# Altium PCB STM32F407.PcbDoc
Units mil, origin at the board's own origin, x right, y up, seen from the top; angles counter-clockwise.
Board outline 2700.03 x 3947.04 mil, 2 copper layers (Top Layer, Bottom Layer); 4 components, 0 nets, 134 pads, 0 vias.
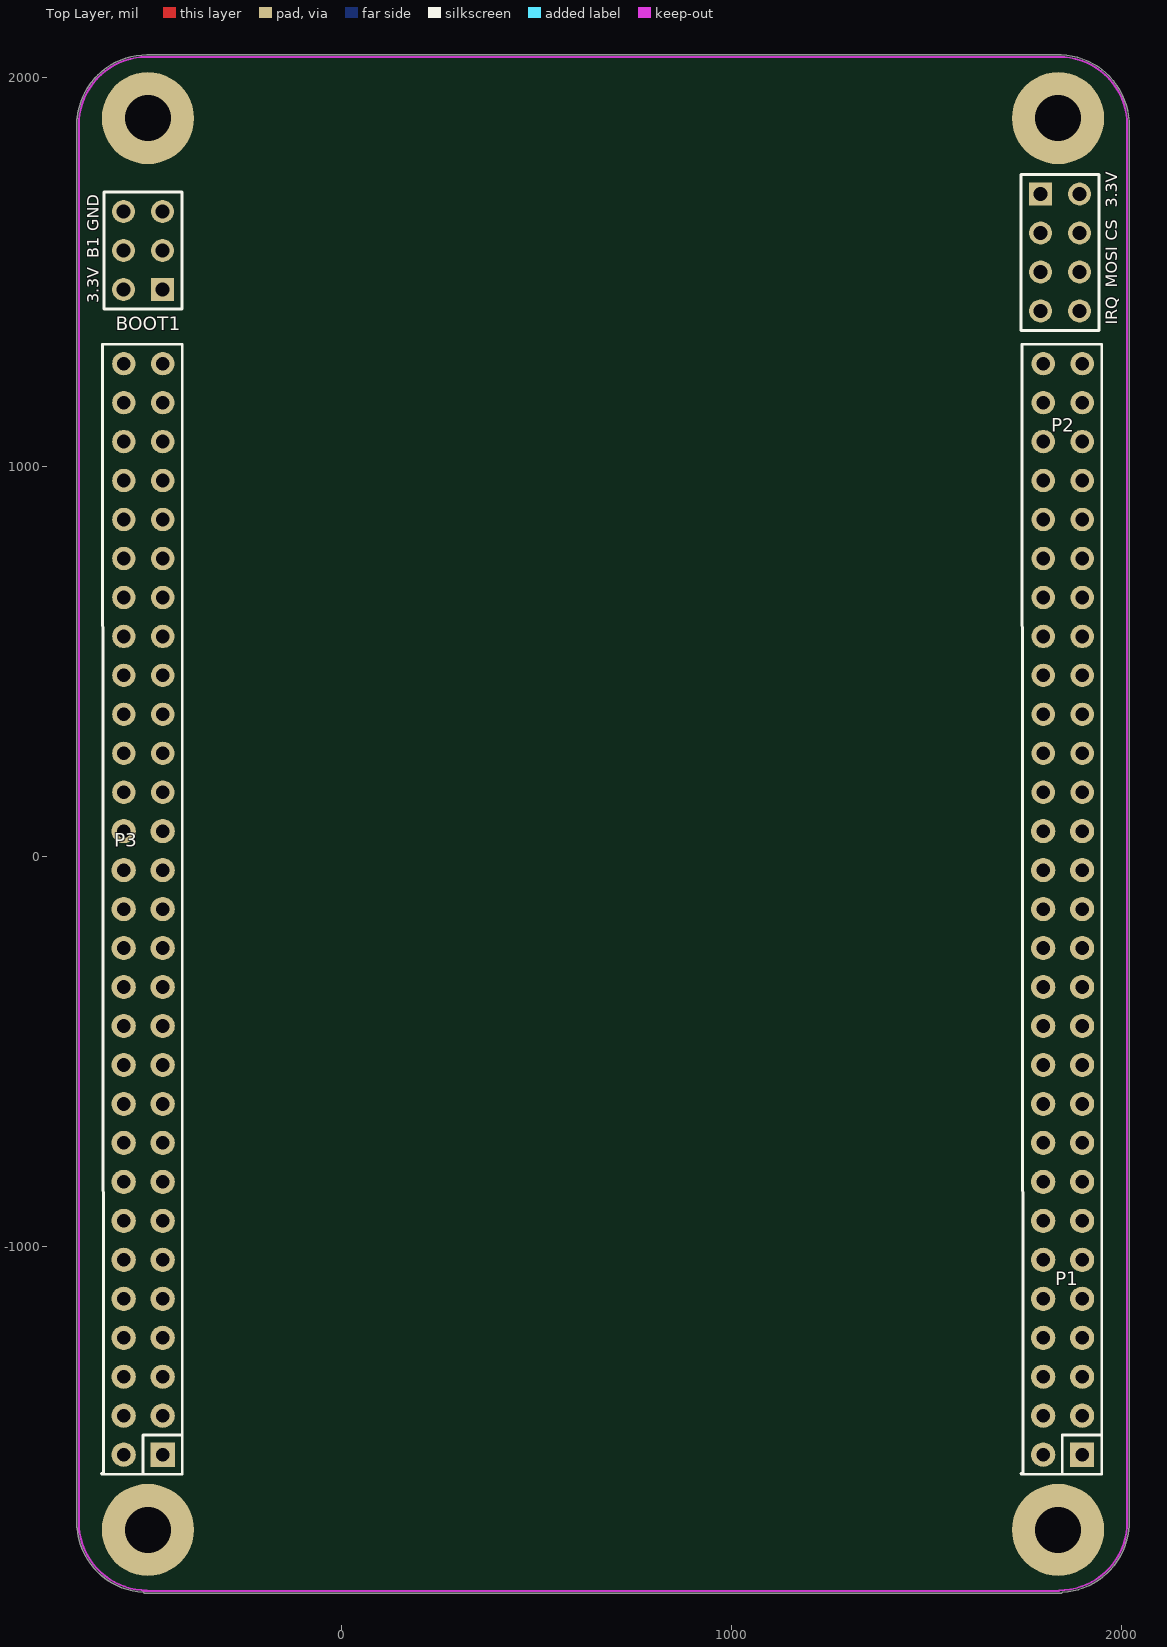
[diagram p0: Top Layer view]
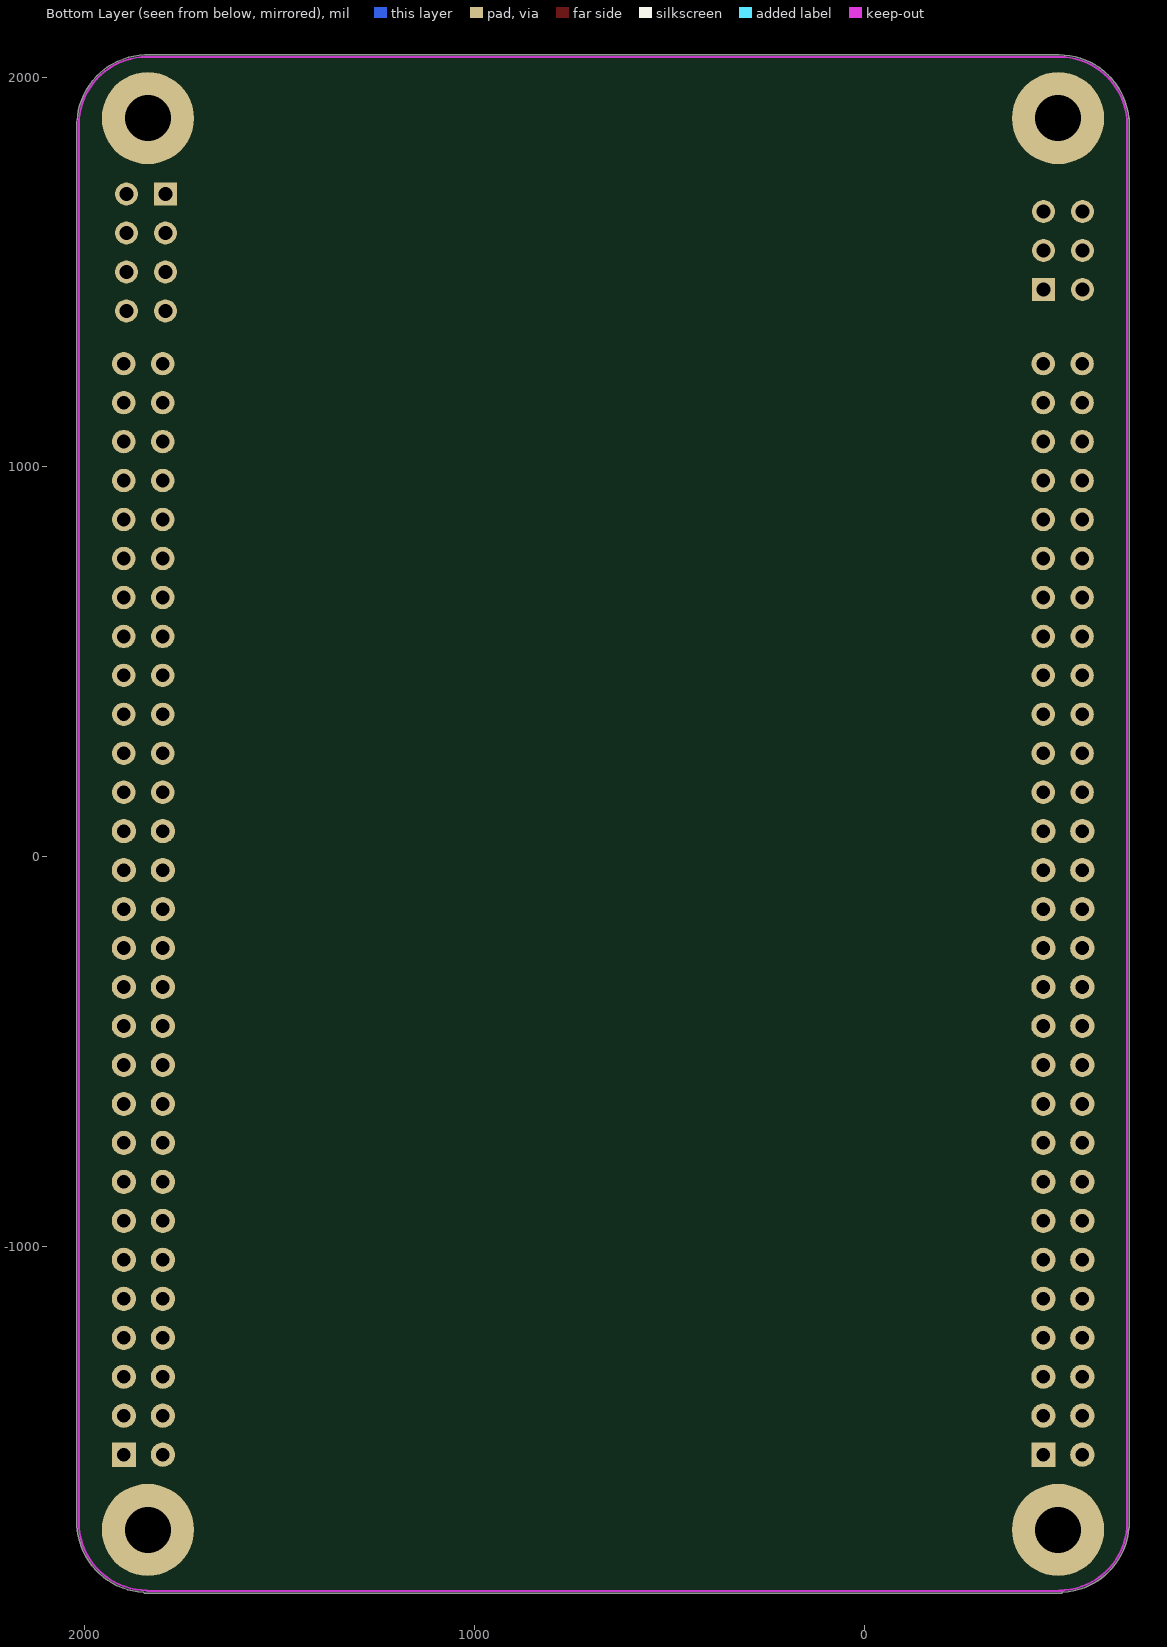
[diagram p1: Bottom Layer view, seen from below]

## Layer stack, top to bottom
Top Layer: signal copper 1.4
Dielectric: dielectric 12.6, FR-4, Dk 4.8
Bottom Layer: signal copper 1.4

## Board outline
-509.18,-1887.78 cw(c-500.07,-1708.06) -679.45,-1722.31 cw(c-675,-1720) -680.02,-1720 -680.02,1892.01 cw(c-675,1892.01) -679.14,1894.84 cw(c-500.07,1877.08) -500.01,2057.02 cw(c-500,2052.01) -500,2057.02 1845,2057.02 cw(c1845,2052.01) 1846,2056.92 cw(c1840,1877.08) 2019.68,1886.8 cw(c2015,1885) 2020.01,1885 2020.01,-1715 cw(c2015,-1715) 2019.82,-1716.39 cw(c1840.07,-1707.99) 1849.22,-1887.7 cw(c1845,-1885) 1845,-1890.01 -505,-1890.01 cw(c-505,-1885)

## Design rules (kind name [scope] priority, off if disabled: settings)
Clearance [All] p1: gap=8
PlaneConnect [All] p1: planeconnectstyle=Direct reliefexpansion=20 reliefentries=4 reliefconductorwidth=10 reliefairgap=10
PolygonConnect [All] p1: connectstyle=Direct reliefconductorwidth=10 reliefentries=4 polygonreliefangle="90 Angle"
RoutingVias [All] p1: holewidth=28 width=50 viastyle="Through Hole" minholewidth=15 minwidth=15 maxholewidth=28 maxwidth=50
SolderMaskExpansion [All] p1: expansion=4
TestPointUsage [All] p1: valid=0 allowmultiple=FALSE
Testpoint [All] p1: side=15 testpointundercomponent=TRUE minsize=40 maxsize=100 preferedsize=60 minholesize=0 maxholesize=40 preferedholesize=32 testpointgrid=1 style=1023 order=0-112345678
Width [All] p1: maxlimit=70 minlimit=8 preferedwidth=10
18 further rules are at their usual default settings.

## Components (designator, comment, footprint, x,y, rotation, side; value= is the part's Value field where it differs from the comment)
BOOT1 "" HDR2X3 -460.3,1455 r90 top
P1 "NRF2401" HDR2X4 1792.81,1700 r270 top
P2 "HEAD2*27" HEAD2*27 1849.65,-135 r90 top
P3 "HEAD2*27" HEAD2*27 -509.65,-135 r90 top

## Footprints (in the part's own frame and the unit in brackets; to place one, negate y for a bottom-side part, rotate by r counter-clockwise, add the part's x,y. Pads: shape width x height; smd on the part's side, far side on the other; paste and mask are expansions set on the pad)
HDR2X3 [mm]
  rect 1.5x1.5 hole 0.9: 1(0,0)
  round 1.5 hole 0.9: 2(0,2.54) 3(2.54,0) 4(2.54,2.54) 5(5.08,0) 6(5.08,2.54)
  silkscreen extent -1.27,-1.27 6.35,3.81
HDR2X4 [mm] "Connector; Header; 4x2 Position"
  rect 1.5x1.5 hole 0.9: 1(0,0)
  round 1.5 hole 0.9: 2(0,2.54) 3(2.54,0) 4(2.54,2.54) 5(5.08,0) 6(5.08,2.54) 7(7.62,0) 8(7.62,2.54)
  silkscreen extent -1.27,-1.27 8.89,3.81
HEAD2*27 [mil]
  rect 62x62 hole 35: 1(-1399.79,-49.79)
  round 62 hole 35: 2(-1399.79,50.21) 3(-1299.79,-49.79) 4(-1299.79,50.21) 5(-1199.79,-49.79) 6(-1199.79,50.21) 7(-1099.79,-49.79) 8(-1099.79,50.21) 9(-999.79,-49.79) 10(-999.79,50.21) 11(-899.79,-49.79) 12(-899.79,50.21) 13(-799.79,-49.79) 14(-799.79,50.21) 15(-699.79,-49.79) 16(-699.79,50.21) 17(-599.79,-49.79) 18(-599.79,50.21) 19(-499.79,-49.79) 20(-499.79,50.21) 21(-399.79,-49.79) 22(-399.79,50.21) 23(-299.79,-49.79) 24(-299.79,50.21) 25(-199.79,-49.79) 26(-199.79,50.21) 27(-99.79,-49.79) 28(-99.79,50.21) 29(0.21,-49.79) 30(0.21,50.21) 31(100.21,-49.79) 32(100.21,50.21) 33(200.21,-49.79) 34(200.21,50.21)
  round 60 hole 35: 35(299.79,-50.21) 36(299.79,49.79) 37(399.79,-50.21) 38(399.79,49.79) 39(499.79,-50.21) 40(499.79,49.79) 41(599.79,-50.21) 42(599.79,49.79) 43(699.79,-50.21) 44(699.79,49.79) 45(799.79,-50.21) 46(799.79,49.79) 47(899.79,-50.21) 48(899.79,49.79) 49(999.79,-50.21) 50(999.79,49.79) 51(1099.79,-50.21) 52(1099.79,49.79) 53(1199.79,-50.21) 54(1199.79,49.79) 55(1299.79,-50.21) 56(1299.79,49.79) 57(1399.79,-50.21) 58(1399.79,49.79)
  silkscreen extent -1450,-100 1450,107

## Part data
BOOT1: library part "Header 3X2", "Header, 3-Pin, Dual row"
P1: library part HEAD2*27
P3: library part "Header 2X2", "Header, 2-Pin, Dual row"

## Free pads (board coordinates)
  round 236.22 hole 118.11: 0(-497.83,-1727.52) 1(1837.83,-1727.52) 2(-497.83,1894.53) 3(1837.83,1894.53)

## Nets (pads, with @x,y where several pads share a name; then routed paths per layer and width w, separated by ;. In a path a pad name is that pad's centre, name@x,y a point inside that pad or via, vN(x,y) a via of type N, cw(c..) or ccw(c..) an arc to the next point about the centre after c; other vN are vias at no path point)
pads on no net: BOOT1.1 BOOT1.2 BOOT1.3 BOOT1.4 BOOT1.5 BOOT1.6 P1.1 P1.2 P1.3 P1.4 P1.5 P1.6 P1.7 P1.8 P2.1 P2.2 P2.3 P2.4 P2.5 P2.6 P2.7 P2.8 P2.9 P2.10 P2.11 P2.12 P2.13 P2.14 P2.15 P2.16 P2.17 P2.18 P2.19 P2.20 P2.21 P2.22 P2.23 P2.24 P2.25 P2.26 P2.27 P2.28 P2.29 P2.30 P2.31 P2.32 P2.33 P2.34 P2.35 P2.36 P2.37 P2.38 P2.39 P2.40 P2.41 P2.42 P2.43 P2.44 P2.45 P2.46 P2.47 P2.48 P2.49 P2.50 P2.51 P2.52 P2.53 P2.54 P2.55 P2.56 P2.57 P2.58 P3.1 P3.2 P3.3 P3.4 P3.5 P3.6 P3.7 P3.8 P3.9 P3.10 P3.11 P3.12 P3.13 P3.14 P3.15 P3.16 P3.17 P3.18 P3.19 P3.20 P3.21 P3.22 P3.23 P3.24 P3.25 P3.26 P3.27 P3.28 P3.29 P3.30 P3.31 P3.32 P3.33 P3.34 P3.35 P3.36 P3.37 P3.38 P3.39 P3.40 P3.41 P3.42 P3.43 P3.44 P3.45 P3.46 P3.47 P3.48 P3.49 P3.50 P3.51 P3.52 P3.53 P3.54 P3.55 P3.56 P3.57 P3.58

## Keep-outs
Keep-Out Layer:
  lines w5: -675,-1735 -675,1877.08 cw(c-500.07,1877.08) -500,2052.01 ; -675,-1707.99 ccw(c-500.07,-1708.06) -500.07,-1882.99 ; -515,2052.01 1850,2052.01 ; -510,-1885 1840,-1885 ; 1840,-1882.92 ccw(c1840.07,-1707.99) 2015,-1707.99 ; 1840,2052.01 cw(c1840,1877.08) 2014.93,1877.01 ; 2015,-1720 2015,1877.01

## Silkscreen, mask and mechanical layers (free items; w line width, h text height)
Top Overlay:
  text "3.3V" at 1990,1665 h30 r90
  text "GND" at -624,1605 h30 r90
  text "CS" at 1990,1580 h30 r90
  text "B1" at -624,1535 h30 r90
  text "MOSI" at 1990,1460 h30 r90
  text "3.3V" at -624,1420 h30 r90
  text "IRQ" at 1990,1365 h30 r90